# EAGLE board ALU V3.1 (EAGLE 9.6.2), part 1 of 2
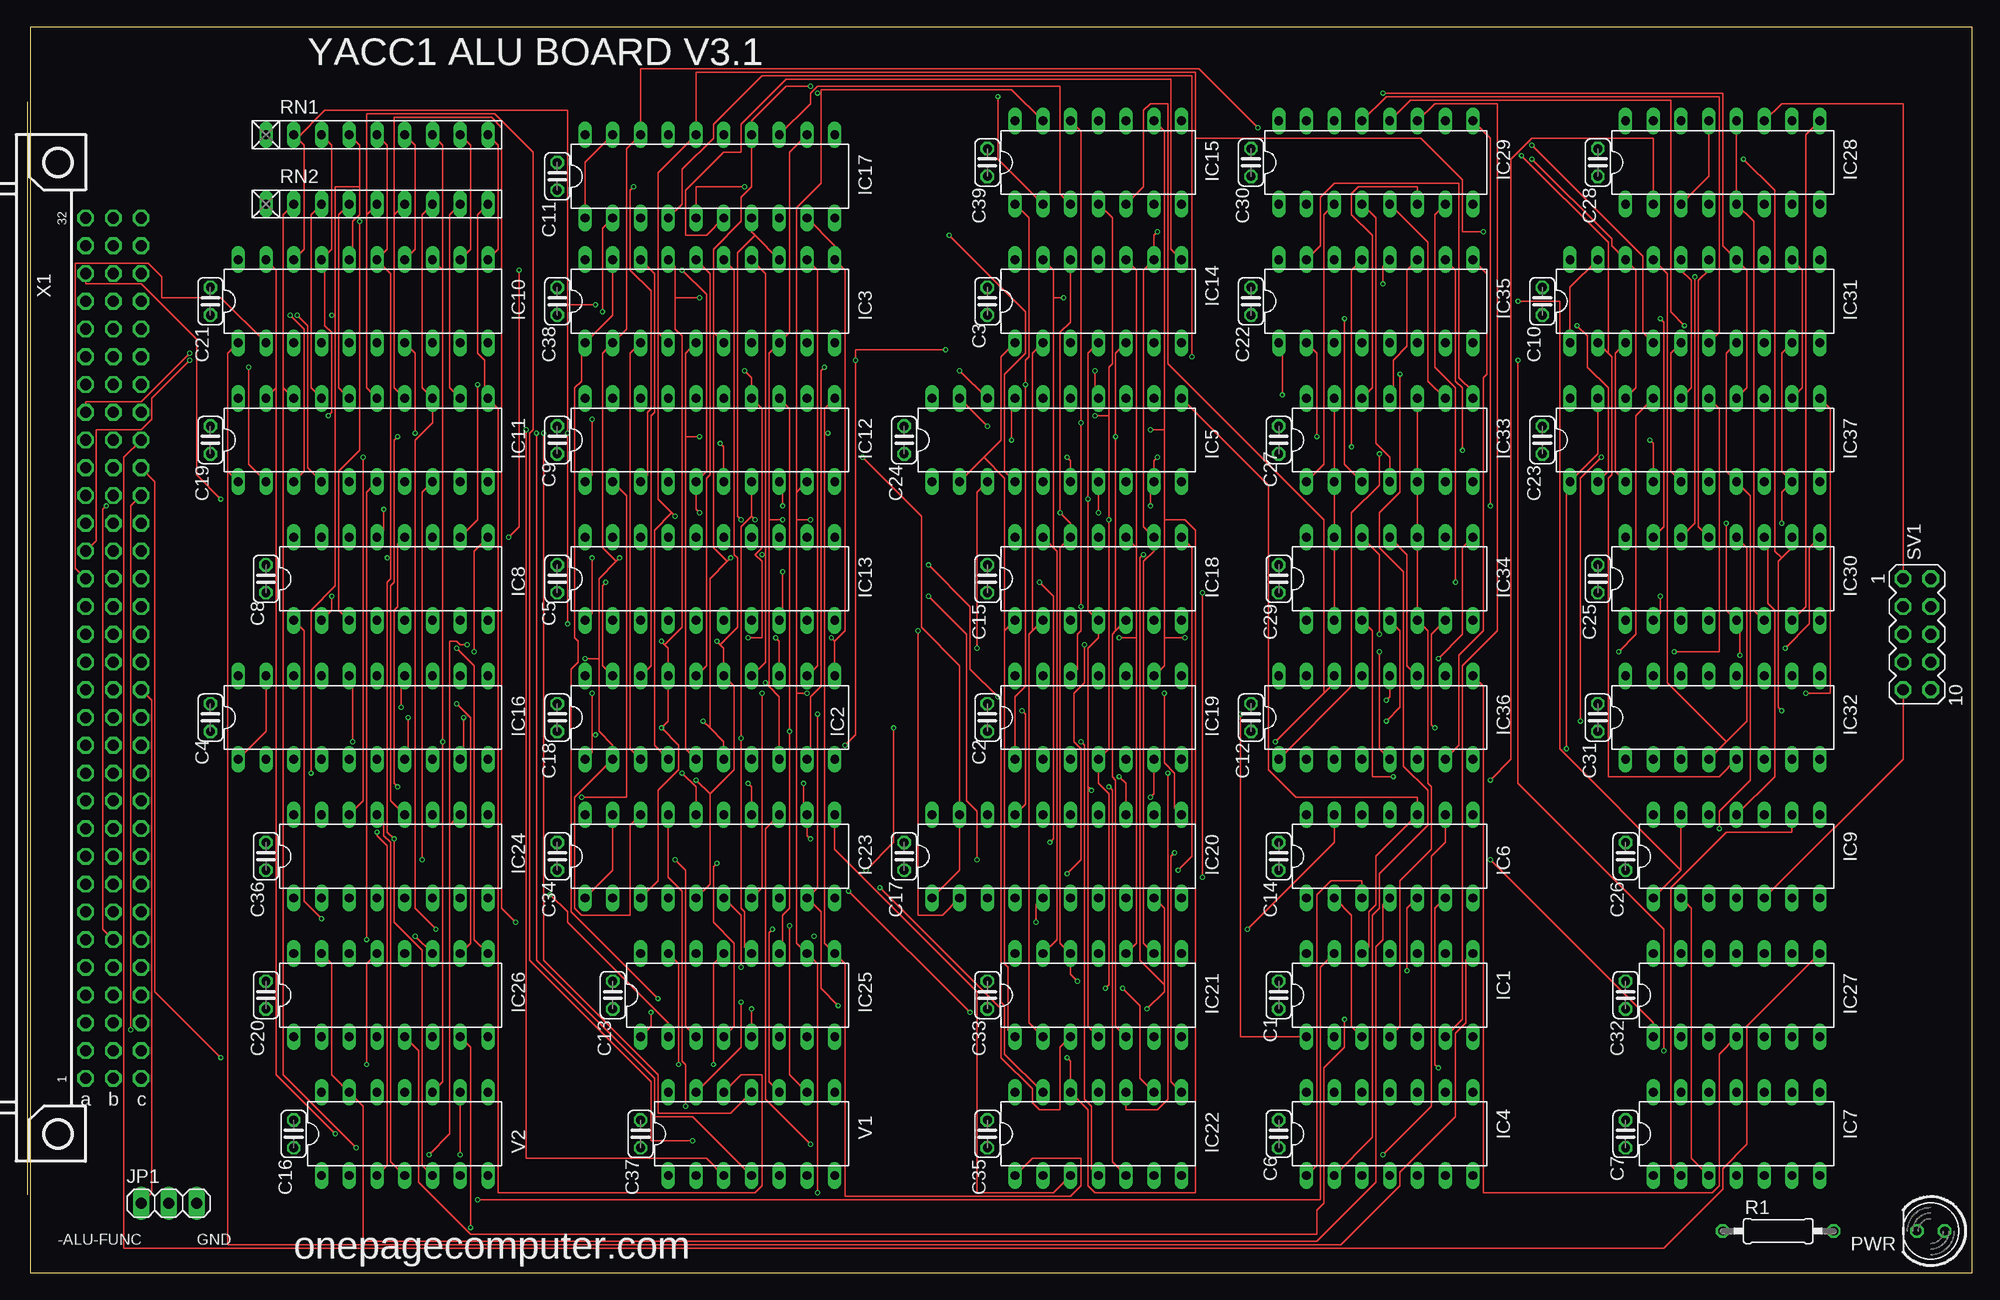
[diagram p0: board, top side]
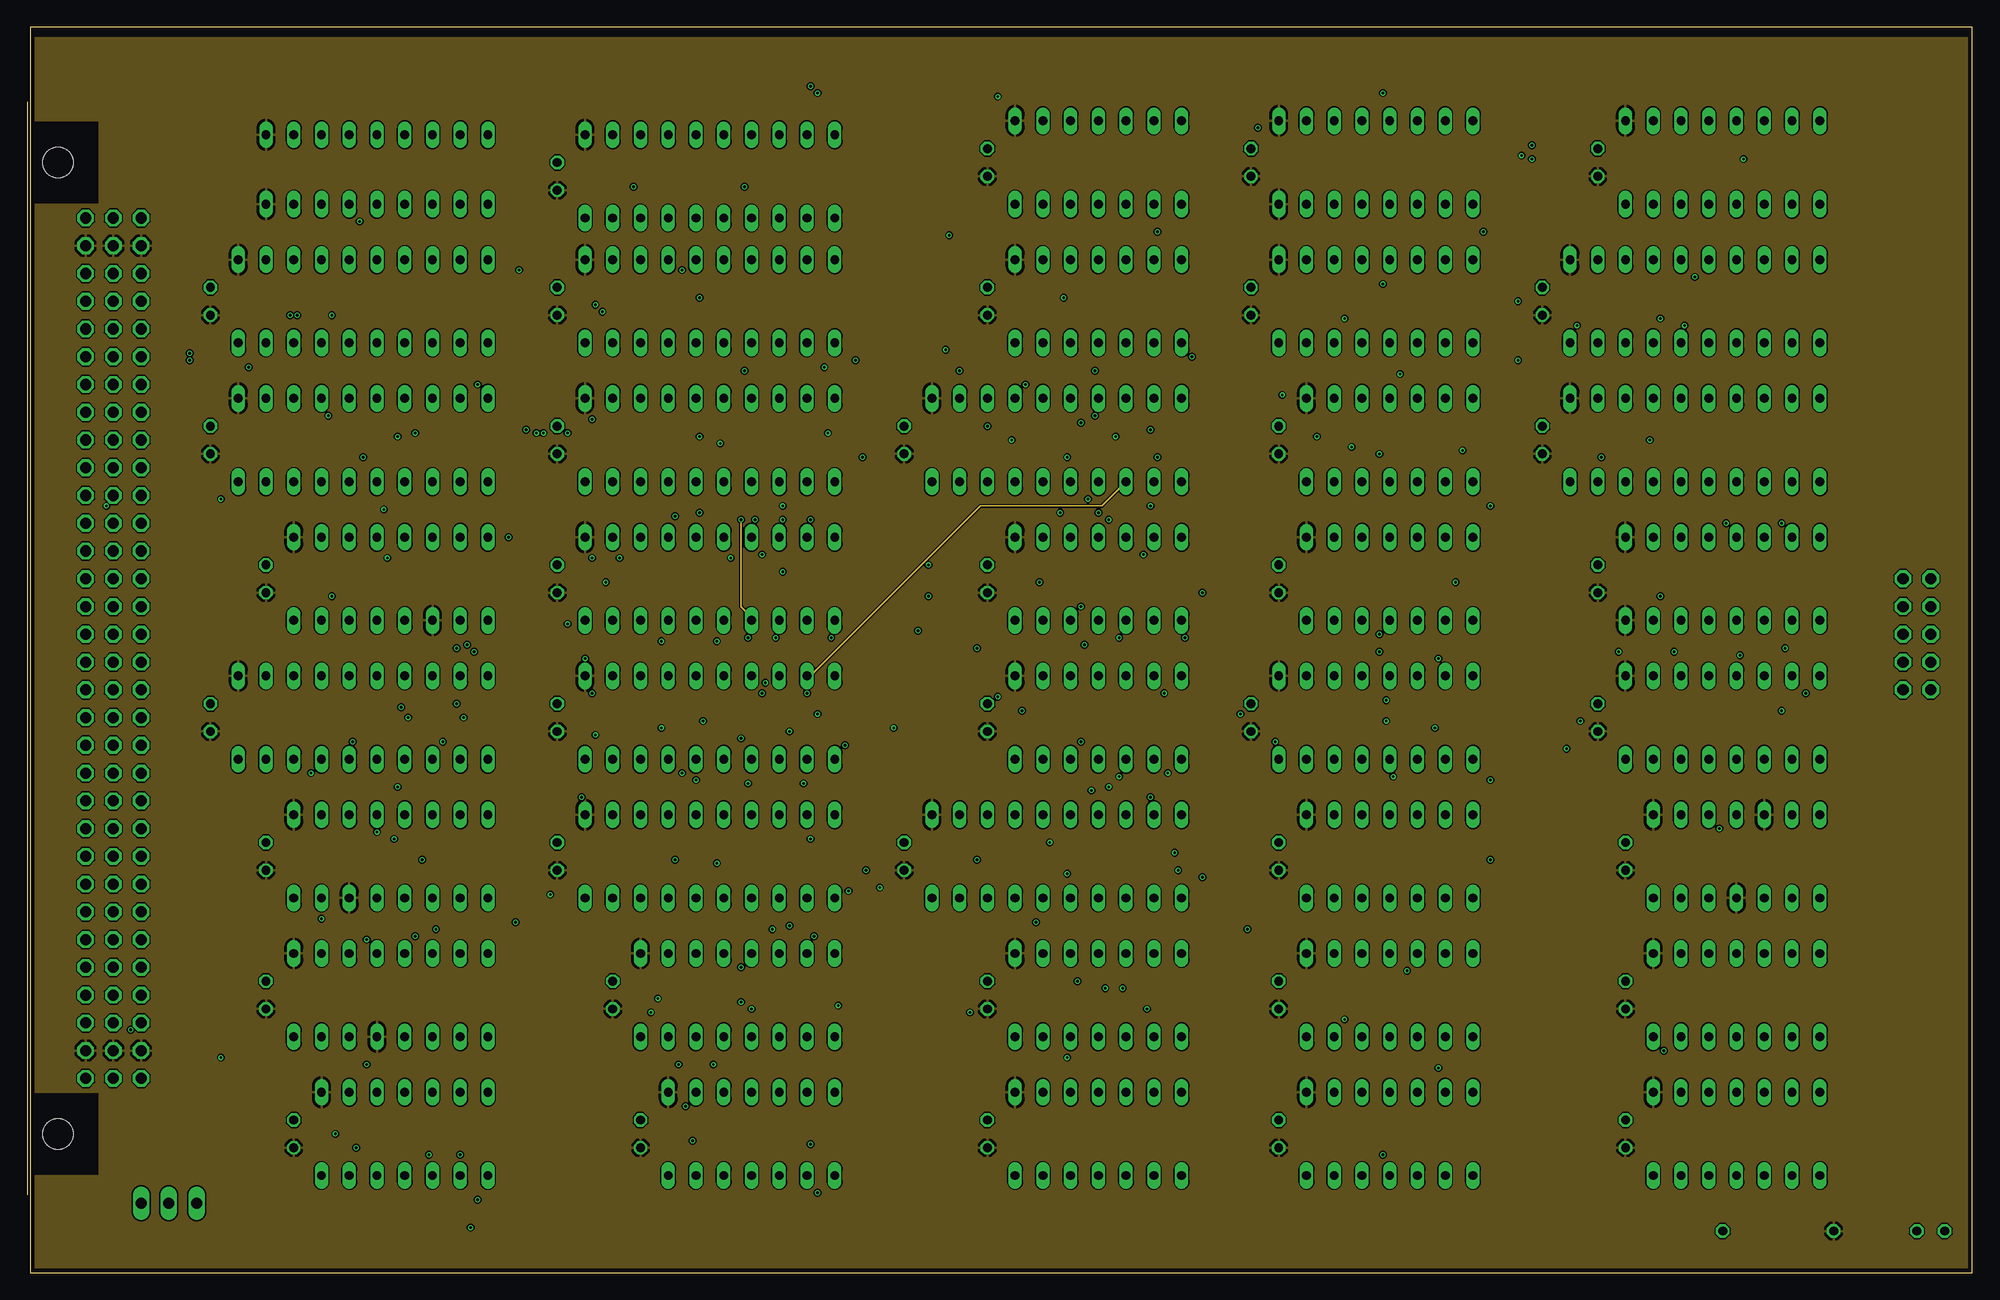
[diagram p1: board, inner layer Route2]
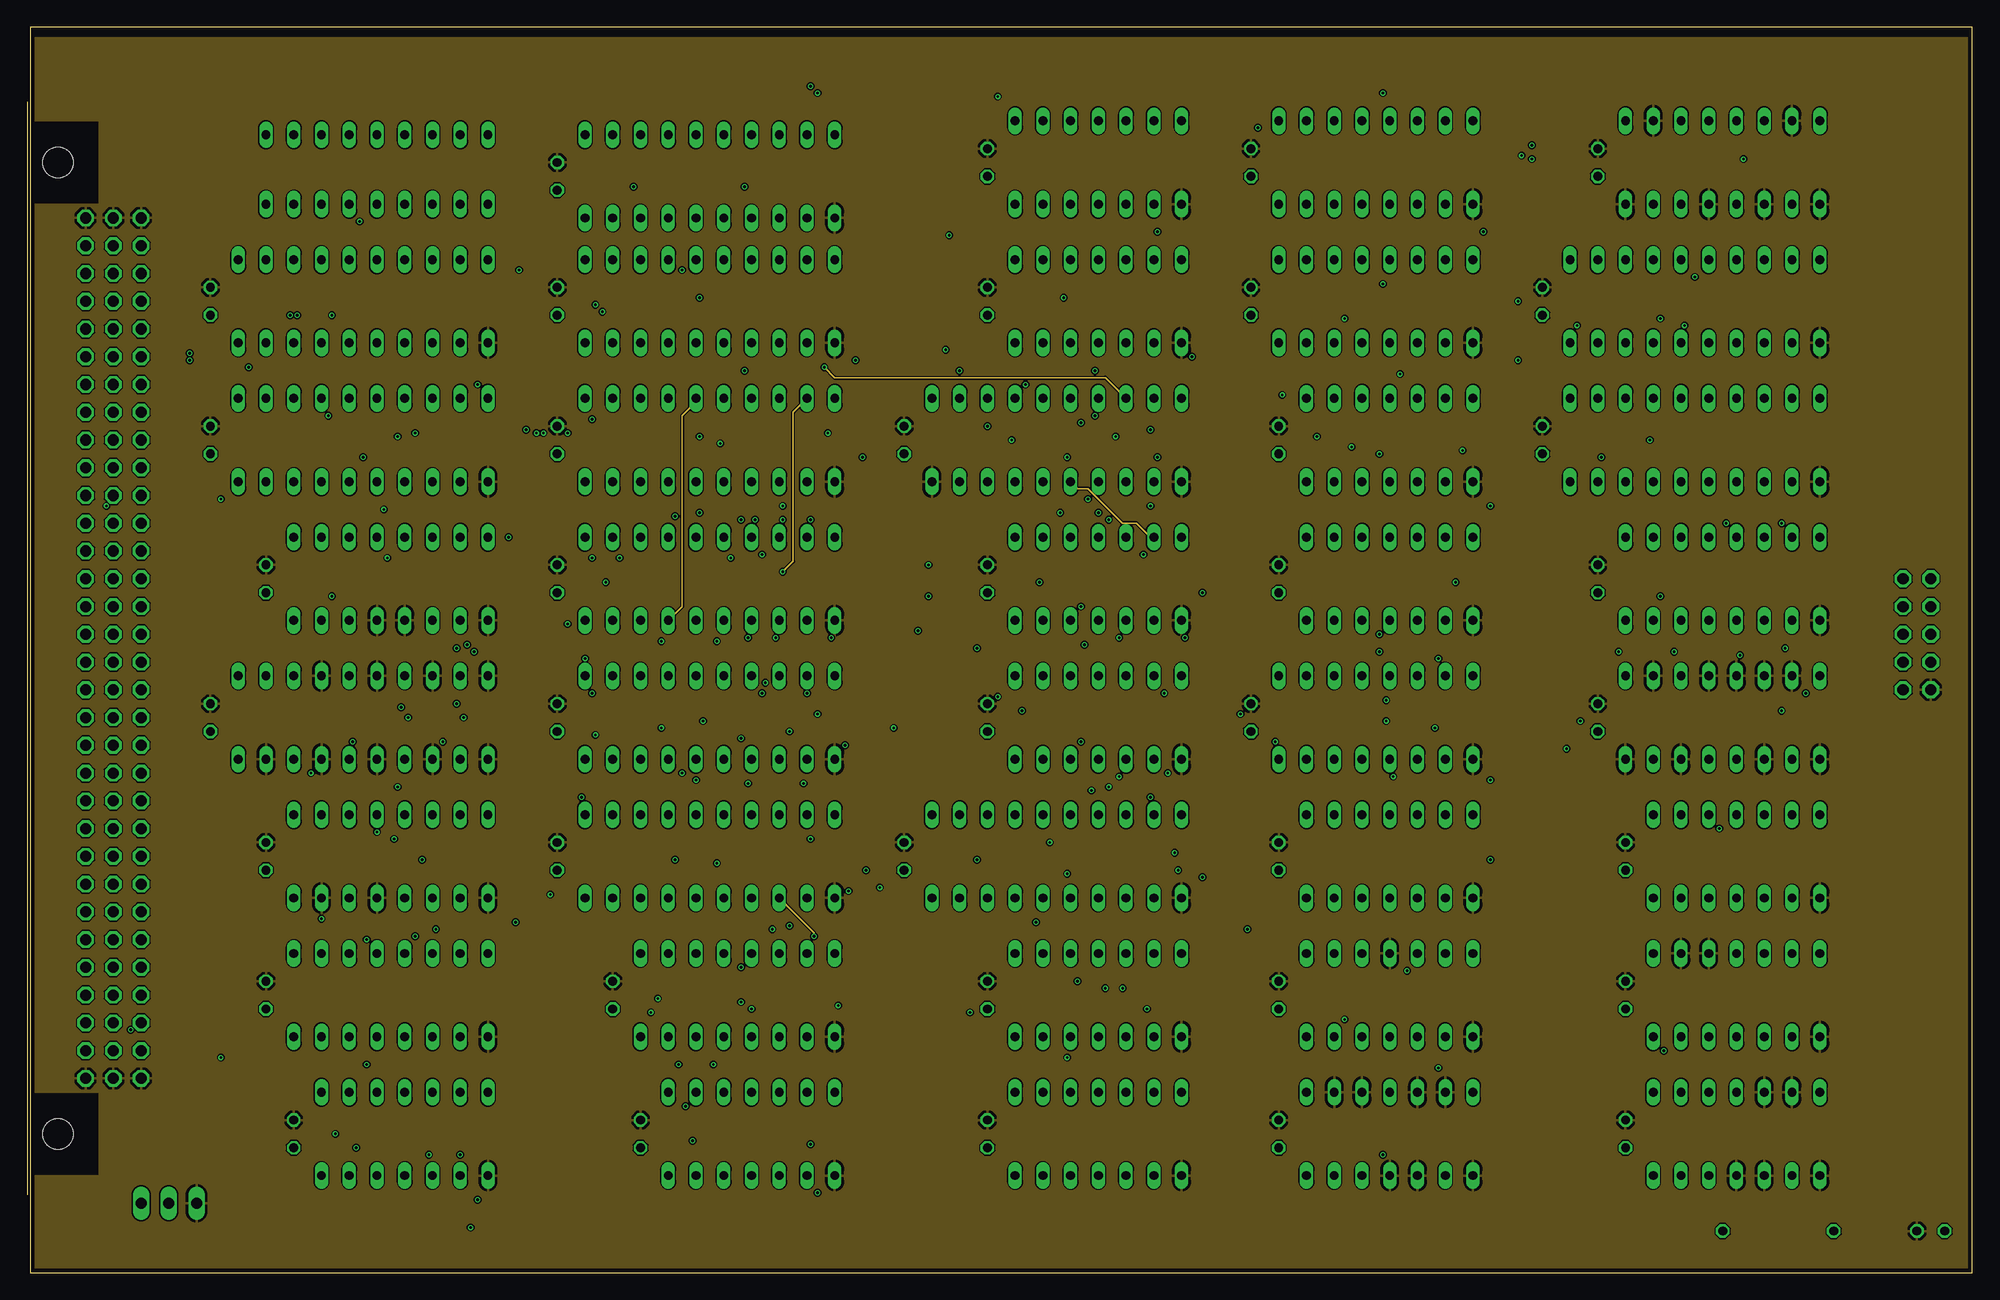
[diagram p2: board, inner layer Route15]
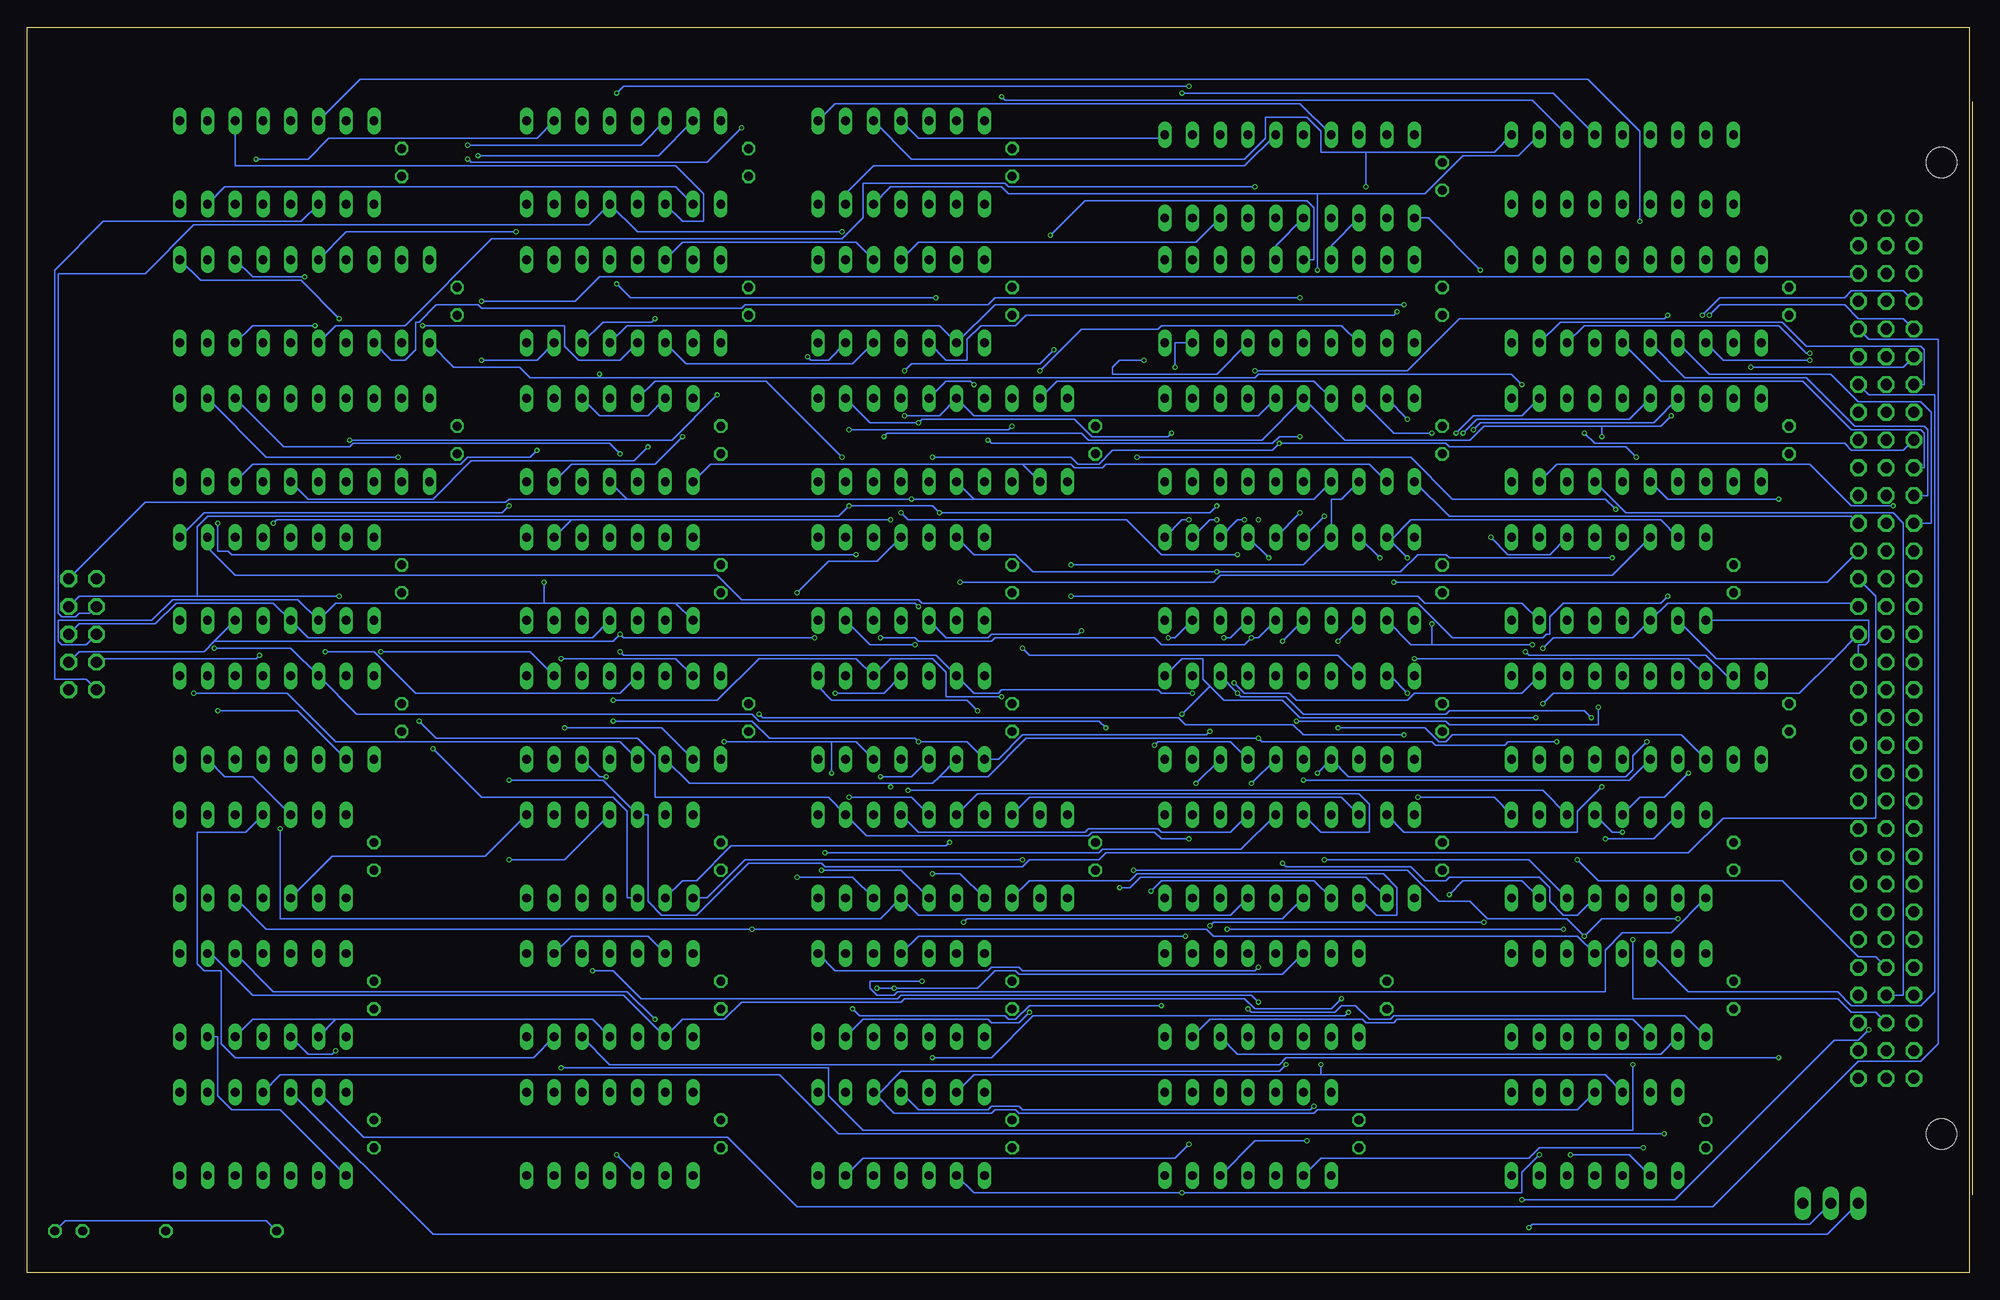
[diagram p3: board, bottom side, seen from below]

Size 177.78 x 113.97 mm. Coordinates in mm from the lower left corner, seen from the top.
Outline: 0,0 177.78,0 177.78,113.97 0,113.97 0,0
Copper layers (1*2*15*16): Top 0.035559375mm / dielectric 0.17018125mm / Route2 0.01778125mm / dielectric 47mil / Route15 0.01778125mm / dielectric 0.17018125mm / Bottom 0.035559375mm
Design rules "oshpark-4layer *": minimum track width 5mil, minimum drill 10mil, track to track 5mil, track to pad 5mil, pad to pad 5mil, via to via 5mil, smd to smd 5mil, copper to edge 15mil, drill to drill 6mil, minimum pad ring 4mil, minimum via ring 4mil, stop-mask expansion 2.5mil, vias tented up to drill 0mil, thermal gap 10mil

## Footprints (pad centres in the part's own frame; a part is rotated, then mirrored left to right if it is on the bottom)
C025-024X044 = drill 0.813 octagon: 1 -1.27,0; 2 1.27,0
DIL14 = drill 0.813 long: 1 -7.62,-3.81; 2 -5.08,-3.81; 3 -2.54,-3.81; 4 0,-3.81; 5 2.54,-3.81; 6 5.08,-3.81; 7 7.62,-3.81; 8 7.62,3.81; 9 5.08,3.81; 10 2.54,3.81; 11 0,3.81; 12 -2.54,3.81; 13 -5.08,3.81; 14 -7.62,3.81
DIL20 = drill 0.813 long: 1 -11.43,-3.81; 2 -8.89,-3.81; 3 -6.35,-3.81; 4 -3.81,-3.81; 5 -1.27,-3.81; 6 1.27,-3.81; 7 3.81,-3.81; 8 6.35,-3.81; 9 8.89,-3.81; 10 11.43,-3.81; 11 11.43,3.81; 12 8.89,3.81; 13 6.35,3.81; 14 3.81,3.81; 15 1.27,3.81; 16 -1.27,3.81; 17 -3.81,3.81; 18 -6.35,3.81; 19 -8.89,3.81; 20 -11.43,3.81
DIL16 = drill 0.813 long: 1 -8.89,-3.81; 2 -6.35,-3.81; 3 -3.81,-3.81; 4 -1.27,-3.81; 5 1.27,-3.81; 6 3.81,-3.81; 7 6.35,-3.81; 8 8.89,-3.81; 9 8.89,3.81; 10 6.35,3.81; 11 3.81,3.81; 12 1.27,3.81; 13 -1.27,3.81; 14 -3.81,3.81; 15 -6.35,3.81; 16 -8.89,3.81
1X03 = drill 1.016 long: 1 -2.54,0; 2 0,0; 3 2.54,0
LED5MM = drill 0.813 octagon: A -1.27,0; K 1.27,0
0207/10 = drill 0.813 octagon: 1 -5.08,0; 2 5.08,0
RN-9 = drill 0.813 long: 1 -10.16,0; 2 -7.62,0; 3 -5.08,0; 4 -2.54,0; 5 0,0; 6 2.54,0; 7 5.08,0; 8 7.62,0; 9 10.16,0
MA05-2 = drill 1.016 octagon: 1 -5.08,-1.27; 2 -5.08,1.27; 3 -2.54,-1.27; 4 -2.54,1.27; 5 0,-1.27; 6 0,1.27; 7 2.54,-1.27; 8 2.54,1.27; 9 5.08,-1.27; 10 5.08,1.27
FABC96R = drill 1.016 octagon: A1 -2.54,39.37; A2 -2.54,36.83; A3 -2.54,34.29; A4 -2.54,31.75; A5 -2.54,29.21; A6 -2.54,26.67; A7 -2.54,24.13; A8 -2.54,21.59; A9 -2.54,19.05; A10 -2.54,16.51; A11 -2.54,13.97; A12 -2.54,11.43; A13 -2.54,8.89; A14 -2.54,6.35; A15 -2.54,3.81; A16 -2.54,1.27; A17 -2.54,-1.27; A18 -2.54,-3.81; A19 -2.54,-6.35; A20 -2.54,-8.89; A21 -2.54,-11.43; A22 -2.54,-13.97; A23 -2.54,-16.51; A24 -2.54,-19.05; A25 -2.54,-21.59; A26 -2.54,-24.13; A27 -2.54,-26.67; A28 -2.54,-29.21; A29 -2.54,-31.75; A30 -2.54,-34.29; A31 -2.54,-36.83; A32 -2.54,-39.37; B1 -5.08,39.37; B2 -5.08,36.83; B3 -5.08,34.29; B4 -5.08,31.75; B5 -5.08,29.21; B6 -5.08,26.67; B7 -5.08,24.13; B8 -5.08,21.59; B9 -5.08,19.05; B10 -5.08,16.51; B11 -5.08,13.97; B12 -5.08,11.43; B13 -5.08,8.89; B14 -5.08,6.35; B15 -5.08,3.81; B16 -5.08,1.27; B17 -5.08,-1.27; B18 -5.08,-3.81; B19 -5.08,-6.35; B20 -5.08,-8.89; B21 -5.08,-11.43; B22 -5.08,-13.97; B23 -5.08,-16.51; B24 -5.08,-19.05; B25 -5.08,-21.59; B26 -5.08,-24.13; B27 -5.08,-26.67; B28 -5.08,-29.21; B29 -5.08,-31.75; B30 -5.08,-34.29; B31 -5.08,-36.83; B32 -5.08,-39.37; C1 -7.62,39.37; C2 -7.62,36.83; C3 -7.62,34.29; C4 -7.62,31.75; C5 -7.62,29.21; C6 -7.62,26.67; C7 -7.62,24.13; C8 -7.62,21.59; C9 -7.62,19.05; C10 -7.62,16.51; C11 -7.62,13.97; C12 -7.62,11.43; C13 -7.62,8.89; C14 -7.62,6.35; C15 -7.62,3.81; C16 -7.62,1.27; C17 -7.62,-1.27; C18 -7.62,-3.81; C19 -7.62,-6.35; C20 -7.62,-8.89; C21 -7.62,-11.43; C22 -7.62,-13.97; C23 -7.62,-16.51; C24 -7.62,-19.05; C25 -7.62,-21.59; C26 -7.62,-24.13; C27 -7.62,-26.67; C28 -7.62,-29.21; C29 -7.62,-31.75; C30 -7.62,-34.29; C31 -7.62,-36.83; C32 -7.62,-39.37 | hole 2.794: 0,-44.456; 0,44.456

## Placement (x,y rotation side)
C1  .1uf  [C025-024X044]  114.3,25.4 90 top
C2  .1uf  [C025-024X044]  87.63,50.8 90 top
C3  .1uf  [C025-024X044]  87.63,88.9 90 top
C4  .1uf  [C025-024X044]  16.51,50.8 90 top
C5  .1uf  [C025-024X044]  48.26,63.5 90 top
C6  .1uf  [C025-024X044]  114.3,12.7 90 top
C7  .1uf  [C025-024X044]  146.05,12.7 90 top
C8  .1uf  [C025-024X044]  21.59,63.5 90 top
C9  .1uf  [C025-024X044]  48.26,76.2 90 top
C10  .1uf  [C025-024X044]  138.43,88.9 90 top
C11  .1uf  [C025-024X044]  48.26,100.33 90 top
C12  .1uf  [C025-024X044]  111.76,50.8 90 top
C13  .1uf  [C025-024X044]  53.34,25.4 90 top
C14  .1uf  [C025-024X044]  114.3,38.1 90 top
C15  .1uf  [C025-024X044]  87.63,63.5 90 top
C16  .1uf  [C025-024X044]  24.13,12.7 90 top
C17  .1uf  [C025-024X044]  80.01,38.1 90 top
C18  .1uf  [C025-024X044]  48.26,50.8 90 top
C19  .1uf  [C025-024X044]  16.51,76.2 90 top
C20  .1uf  [C025-024X044]  21.59,25.4 90 top
C21  ,1uf  [C025-024X044]  16.51,88.9 90 top
C22  .1uf  [C025-024X044]  111.76,88.9 90 top
C23  .1uf  [C025-024X044]  138.43,76.2 90 top
C24  .1uf  [C025-024X044]  80.01,76.2 90 top
C25  .1uf  [C025-024X044]  143.51,63.5 90 top
C26  .1uf  [C025-024X044]  146.05,38.1 90 top
C27  .1uf  [C025-024X044]  114.3,76.2 90 top
C28  .1uf  [C025-024X044]  143.51,101.6 90 top
C29  .1uf  [C025-024X044]  114.3,63.5 90 top
C30  .1uf  [C025-024X044]  111.76,101.6 90 top
C31  .1uf  [C025-024X044]  143.51,50.8 90 top
C32  .1uf  [C025-024X044]  146.05,25.4 90 top
C33  .1uf  [C025-024X044]  87.63,25.4 90 top
C34  .1uf  [C025-024X044]  48.26,38.1 90 top
C35  .1uf  [C025-024X044]  87.63,12.7 90 top
C36  .1uf  [C025-024X044]  21.59,38.1 90 top
C37  .1uf  [C025-024X044]  55.88,12.7 90 top
C38  .1uf  [C025-024X044]  48.26,88.9 90 top
C39  .1uf  [C025-024X044]  87.63,101.6 90 top
IC1  74ALS04N  [DIL14]  124.46,25.4 0 top
IC2  74LS240N  [DIL20]  62.23,50.8 0 top
IC3  74LS244N  [DIL20]  62.23,88.9 0 top
IC4  74LS00N  [DIL14]  124.46,12.7 0 top
IC5  74LS374N  [DIL20]  93.98,76.2 0 top
IC6  74ALS08N  [DIL14]  124.46,38.1 0 top
IC7  74LS32N  [DIL14]  156.21,12.7 0 top
IC8  74LS138N  [DIL16]  33.02,63.5 0 top
IC9  74LS74N  [DIL14]  156.21,38.1 0 top
IC10  74LS245N  [DIL20]  30.48,88.9 0 top
IC11  74LS245N  [DIL20]  30.48,76.2 0 top
IC12  74LS244N  [DIL20]  62.23,76.2 0 top
IC13  74LS244N  [DIL20]  62.23,63.5 0 top
IC14  74LS86N  [DIL14]  97.79,88.9 0 top
IC15  74LS86N  [DIL14]  97.79,101.6 0 top
IC16  74LS244N  [DIL20]  30.48,50.8 0 top
IC17  74LS244N  [DIL20]  62.23,100.33 0 top
IC18  74LS08N  [DIL14]  97.79,63.5 0 top
IC19  74LS08N  [DIL14]  97.79,50.8 0 top
IC20  74LS244N  [DIL20]  93.98,38.1 0 top
IC21  74LS32N  [DIL14]  97.79,25.4 0 top
IC22  74LS32N  [DIL14]  97.79,12.7 0 top
IC23  74LS244N  [DIL20]  62.23,38.1 0 top
IC24  74LS85N  [DIL16]  33.02,38.1 0 top
IC25  74LS85N  [DIL16]  64.77,25.4 0 top
IC26  74LS251N  [DIL16]  33.02,25.4 0 top
IC27  74LS86N  [DIL14]  156.21,25.4 0 top
IC28  74LS153N  [DIL16]  154.94,101.6 0 top
IC29  74LS194N  [DIL16]  123.19,101.6 0 top
IC30  74LS194N  [DIL16]  154.94,63.5 0 top
IC31  74LS244N  [DIL20]  152.4,88.9 0 top
IC32  74LS153N  [DIL16]  154.94,50.8 0 top
IC33  74LS86N  [DIL14]  124.46,76.2 0 top
IC34  74LS86N  [DIL14]  124.46,63.5 0 top
IC35  74LS283N  [DIL16]  123.19,88.9 0 top
IC36  74LS283N  [DIL16]  123.19,50.8 0 top
IC37  74LS244N  [DIL20]  152.4,76.2 0 top
JP1  [1X03]  12.7,6.35 0 top
PWR  [LED5MM]  173.99,3.81 180 top
R1  330  [0207/10]  160.02,3.81 0 top
RN1  10k  [RN-9]  31.75,104.14 0 top
RN2  10k  [RN-9]  31.75,97.79 0 top
SV1  [MA05-2]  172.72,58.42 270 top
V1  744078N  [DIL14]  66.04,12.7 0 top
V2  744078N  [DIL14]  34.29,12.7 0 top
X1  FABC96R  [FABC96R]  2.54,57.15 180 top

## Library data of the parts
C1-C39 = rcl
IC1-IC37 = 74xx-us
JP1 = pinhead
PWR = led
R1 = eagle-ltspice; SPICEMODEL: NONE; SPICEPREFIX: R
RN1 RN2 = resistor-net; OC_FARNELL: unknown; OC_NEWARK: unknown
SV1 = con-lstb; OC_FARNELL: unknown; OC_NEWARK: unknown
V1 V2 = 74ttl-din
X1 = con-vg

## Nets
-AC-LD: IC1.9 IC1.13 X1.C22
-AC-LD-INV: IC1.1 IC2.1 IC2.19 X1.C20
-AC-RD: IC12.1 IC12.19 X1.C21
-ADD: IC6.1 IC8.7
-ADD/SUB: IC4.1 IC6.3 IC37.1 IC37.19
-ADDR-REG-LD0: X1.C4
-ADDR-REG-LD1: X1.C6
-ADDR-REG-RD0: X1.C3
-ADDR-REG-RD1: X1.C5
-ALU-FUNC: IC7.12 JP1.1 X1.C15
-ALU-IO-EN: IC7.11 IC10.19 IC11.19
-AND: IC8.13 IC20.1 IC20.19
-BUS-EN: IC7.13 X1.C28
-BUS-OUT: IC1.8 IC10.1 IC11.1
-DATA: IC8.15 IC13.1 IC13.19
-HL-SWAP: X1.C25
-INT: X1.C13
-INTA: X1.C14
-IO-ADDR-LD: X1.C11
-IO-RD: X1.B25
-IO-WR: X1.B26
-MEM-RD: X1.B23
-MEM-WR: X1.B24
-OR: IC8.12 IC23.1 IC23.19
-REG-DN: X1.B21
-REG-FUNC-LD: X1.B8
-REG-FUNC-RD: X1.B7
-REG-LD-HI: X1.B20
-REG-LD-LO: X1.B18
-REG-RD-HI: X1.B19
-REG-RD-LO: X1.B17
-REG-UP: X1.B22
-RESET: IC9.1 IC9.13 X1.C30
-RUN: X1.C29
-SHIFT: IC4.2 IC8.10 IC31.1 IC31.19
-SR-LD: IC1.5 X1.C23
-SUB: IC1.3 IC6.2 IC8.14
-TMP-REG-LD0: X1.B28
-TMP-REG-LD1: X1.B30
-TMP-REG-RD0: X1.B27
-TMP-REG-RD1: X1.B29
-VMA: X1.C12
-XOR: IC8.11 IC17.1 IC17.19
-ZERO: IC8.9 IC16.1 IC16.19
AC-LD: IC1.12 IC5.11 IC6.10
AC-LD-INV: IC1.2 IC3.1 IC3.19 IC27.9
ACI-DATA0: IC2.18 IC3.18 IC5.3
ACI-DATA1: IC2.16 IC3.16 IC5.4
ACI-DATA2: IC2.14 IC3.14 IC5.7
ACI-DATA3: IC2.12 IC3.12 IC5.8
ACI-DATA4: IC2.9 IC3.9 IC5.13
ACI-DATA5: IC2.7 IC3.7 IC5.14
ACI-DATA6: IC2.5 IC3.5 IC5.17
ACI-DATA7: IC2.3 IC3.3 IC5.18
ACO-DATA0: IC5.2 IC12.2 IC14.1 IC18.1 IC21.1 IC24.9 IC28.11 IC29.3 IC33.1 SV1.1
ACO-DATA1: IC5.5 IC12.4 IC14.4 IC18.4 IC21.4 IC24.11 IC29.4 IC33.4 SV1.2
ACO-DATA2: IC5.6 IC12.6 IC14.9 IC18.9 IC21.9 IC24.14 IC29.5 IC33.9 SV1.3
ACO-DATA3: IC5.9 IC12.8 IC14.12 IC18.12 IC21.12 IC24.1 IC29.6 IC30.2 IC33.12 SV1.4
ACO-DATA4: IC5.12 IC12.11 IC15.12 IC19.12 IC22.1 IC25.9 IC29.7 IC30.3 IC34.1 SV1.5
ACO-DATA5: IC5.15 IC12.13 IC15.1 IC19.1 IC22.4 IC25.11 IC30.4 IC34.4 SV1.6
ACO-DATA6: IC5.16 IC12.15 IC15.4 IC19.4 IC22.9 IC25.14 IC30.5 IC34.9 SV1.7
ACO-DATA7: IC5.19 IC12.17 IC15.9 IC19.9 IC22.12 IC25.1 IC28.5 IC28.12 IC30.6 IC34.12 SV1.8
ADDR0: X1.A3
ADDR1: X1.A4
ADDR2: X1.A5
ADDR3: X1.A6
ADDR4: X1.A7
ADDR5: X1.A8
ADDR6: X1.A9
ADDR7: X1.A10
ADDR8: X1.A11
ADDR9: X1.A12
ADDR10: X1.A13
ADDR11: X1.A14
ADDR12: X1.A15
ADDR13: X1.A16
ADDR14: X1.A17
ADDR15: X1.A18
ALU0: IC8.1 IC26.11 IC29.9 IC30.9 IC32.14 X1.C16
ALU1: IC8.2 IC26.10 IC29.10 IC30.10 IC32.2 X1.C17
ALU2: IC8.3 IC26.9 IC28.14 X1.C18
ALU3: IC6.12 IC28.2 X1.C19
BDATA0: IC10.18 IC12.18 IC13.2 IC14.2 IC18.2 IC21.2 IC24.10 IC35.5 RN1.2 V2.2
BDATA1: IC10.17 IC12.16 IC13.4 IC14.5 IC18.5 IC21.5 IC24.12 IC35.3 RN1.3 V2.3
BDATA2: IC10.16 IC12.14 IC13.6 IC14.10 IC18.10 IC21.10 IC24.13 IC35.14 RN1.4 V2.4
BDATA3: IC10.15 IC12.12 IC13.8 IC14.13 IC18.13 IC21.13 IC24.15 IC35.12 RN1.5 V2.5
BDATA4: IC10.14 IC12.9 IC13.11 IC15.13 IC19.13 IC22.2 IC25.10 IC36.5 RN1.6 V2.9
BDATA5: IC10.13 IC12.7 IC13.13 IC15.2 IC19.2 IC22.5 IC25.12 IC36.3 RN1.7 V2.10
BDATA6: IC10.12 IC12.5 IC13.15 IC15.5 IC19.5 IC22.10 IC25.13 IC36.14 RN1.8 V2.11
BDATA7: IC10.11 IC12.3 IC13.17 IC15.10 IC19.10 IC22.13 IC25.15 IC36.12 RN1.9 V2.12
BDATA8: IC11.18 RN2.2 V1.2
BDATA9: IC11.17 RN2.3 V1.3
BDATA10: IC11.16 RN2.4 V1.4
BDATA11: IC11.15 RN2.5 V1.5
BDATA12: IC11.14 RN2.6 V1.9
BDATA13: IC11.13 RN2.7 V1.10
BDATA14: IC11.12 RN2.8 V1.11
BDATA15: IC11.11 RN2.9 V1.12
BR-COND: IC27.8 X1.C24
C/SHIFT: IC6.13 IC9.5 IC26.12 IC28.3 IC28.13 SV1.9
CO/BO: IC7.1 IC27.6
DATA0: IC10.2 X1.A19
DATA1: IC10.3 X1.A20
DATA2: IC10.4 X1.A21
DATA3: IC10.5 X1.A22
DATA4: IC10.6 X1.A23
DATA5: IC10.7 X1.A24
DATA6: IC10.8 X1.A25
DATA7: IC10.9 X1.A26
DATA8: IC11.2 X1.A27
DATA9: IC11.3 X1.A28
DATA10: IC11.4 X1.A29
DATA11: IC11.5 X1.A30
DATA12: IC11.6 X1.B3
DATA13: IC11.7 X1.B4
DATA14: IC11.8 X1.B5
DATA15: IC11.9 X1.B6
GND: C1.2 C2.2 C3.2 C4.2 C5.2 C6.2 C7.2 C8.2 C9.2 C10.2 C11.2 C12.2 C13.2 C14.2 C15.2 C16.2 C17.2 C18.2 C19.2 C20.2 C21.2 C22.2 C23.2 C24.2 C25.2 C26.2 C27.2 C28.2 C29.2 C30.2 C31.2 C32.2 C33.2 C34.2 C35.2 C36.2 C37.2 C38.2 C39.2 IC1.7 IC1.11 IC2.10 IC3.10 IC4.4 IC4.5 IC4.7 IC4.9 IC4.10 IC4.12 IC4.13 IC5.1 IC5.10 IC6.7 IC7.4 IC7.5 IC7.7 IC7.9 IC7.10 IC8.4 IC8.5 IC8.8 IC9.7 IC10.10 IC11.10 IC12.10 IC13.10 IC14.7 IC15.7 IC16.2 IC16.4 IC16.6 IC16.8 IC16.10 IC16.11 IC16.13 IC16.15 IC16.17 IC17.10 IC18.7 IC19.7 IC20.10 IC21.7 IC22.7 IC23.10 IC24.2 IC24.4 IC24.8 IC25.8 IC26.8 IC27.7 IC27.12 IC27.13 IC28.1 IC28.4 IC28.6 IC28.8 IC28.10 IC28.15 IC29.8 IC30.8 IC31.10 IC32.1 IC32.3 IC32.6 IC32.8 IC32.10 IC32.11 IC32.12 IC32.13 IC32.15 IC33.7 IC34.7 IC35.8 IC36.8 IC37.10 JP1.3 PWR.K SV1.10 V1.7 V2.7 X1.A1 X1.A32 X1.B1 X1.B32 X1.C1 X1.C32
IN: IC26.14 X1.C26
INV-IN0: IC2.2 IC3.2 IC13.18 IC16.18 IC17.18 IC20.18 IC23.18 IC31.18 IC37.18
INV-IN1: IC2.4 IC3.4 IC13.16 IC16.16 IC17.16 IC20.16 IC23.16 IC31.16 IC37.16
INV-IN2: IC2.6 IC3.6 IC13.14 IC16.14 IC17.14 IC20.14 IC23.14 IC31.14 IC37.14
INV-IN3: IC2.8 IC3.8 IC13.12 IC16.12 IC17.12 IC20.12 IC23.12 IC31.12 IC37.12
INV-IN4: IC2.11 IC3.11 IC13.9 IC16.9 IC17.9 IC20.9 IC23.9 IC31.9 IC37.9
INV-IN5: IC2.13 IC3.13 IC13.7 IC16.7 IC17.7 IC20.7 IC23.7 IC31.7 IC37.7
INV-IN6: IC2.15 IC3.15 IC13.5 IC16.5 IC17.5 IC20.5 IC23.5 IC31.5 IC37.5
INV-IN7: IC2.17 IC3.17 IC13.3 IC16.3 IC17.3 IC20.3 IC23.3 IC31.3 IC37.3
IO-ADDR0: X1.C7
IO-ADDR1: X1.C8
IO-ADDR2: X1.C9
IO-ADDR3: X1.C10
N$1: IC27.4 IC36.9
N$2: IC27.3 IC35.7
N$3: IC4.3 IC6.9
N$4: IC26.7 JP1.2
N$5: IC6.8 IC9.3
N$6: IC6.4 IC26.15 V2.13
N$7: IC7.3 IC9.2
N$8: IC6.11 IC27.1
N$11: IC9.12 IC32.7
N$12: IC33.6 IC35.2
N$13: IC34.6 IC36.2
N$14: PWR.A R1.1
N$26: IC33.8 IC35.15
N$27: IC33.11 IC35.11
N$28: IC33.3 IC35.6
N$29: IC34.3 IC36.6
N$31: IC34.8 IC36.15
N$32: IC34.11 IC36.11
N$33: IC35.4 IC37.2
N$34: IC35.1 IC37.4
N$35: IC35.13 IC37.6
N$36: IC35.10 IC37.8
N$37: IC36.4 IC37.11
N$38: IC36.1 IC37.13
N$39: IC36.13 IC37.15
N$40: IC36.10 IC37.17
N$41: IC35.9 IC36.7
N$43: IC24.5 IC25.4
N$45: IC24.6 IC25.3
N$46: IC24.7 IC25.2
N$47: IC25.7 IC26.3
N$48: IC25.6 IC26.2
N$49: IC25.5 IC26.1
N$52: IC6.5 V1.13
N$55: IC6.6 IC26.13
N$56: IC26.5 IC27.10
N$57: IC29.15 IC31.2 IC32.5
N$66: IC29.14 IC31.4
N$69: IC29.13 IC31.6
N$70: IC29.12 IC31.8
N$71: IC30.15 IC31.11
N$72: IC30.14 IC31.13
N$73: IC30.13 IC31.15
N$74: IC30.12 IC31.17 IC32.4
N$75: IC28.7 IC29.2
N$76: IC28.9 IC30.7
N$77: IC21.3 IC23.2
N$78: IC21.6 IC23.4
N$79: IC21.8 IC23.6
N$81: IC21.11 IC23.8
N$82: IC22.3 IC23.11
N$83: IC22.6 IC23.13
N$84: IC22.8 IC23.15
N$85: IC22.11 IC23.17
N$86: IC18.3 IC20.2
N$87: IC18.6 IC20.4
N$88: IC18.8 IC20.6
N$89: IC18.11 IC20.8
N$90: IC19.11 IC20.11
N$91: IC19.3 IC20.13
N$92: IC19.6 IC20.15
N$93: IC19.8 IC20.17
N$94: IC14.3 IC17.2
N$95: IC14.6 IC17.4
N$96: IC14.8 IC17.6
N$97: IC14.11 IC17.8
N$98: IC15.11 IC17.11
N$99: IC15.3 IC17.13
N$100: IC15.6 IC17.15
N$101: IC15.8 IC17.17
OUT: X1.C27
REG-LD-ID0: X1.B13
REG-LD-ID1: X1.B14
REG-LD-ID2: X1.B15
REG-LD-ID3: X1.B16
REG-RD-ID0: X1.B9
REG-RD-ID1: X1.B10
REG-RD-ID2: X1.B11
REG-RD-ID3: X1.B12
SHIFT-OUT: IC7.2 IC9.9
SR-LD: IC1.6 IC9.11 IC29.11 IC30.11
SUB: IC1.4 IC27.2 IC27.5 IC33.2 IC33.5 IC33.10 IC33.13 IC34.2 IC34.5 IC34.10 IC34.13
VCC: C1.1 C2.1 C3.1 C4.1 C5.1 C6.1 C7.1 C8.1 C9.1 C10.1 C11.1 C12.1 C13.1 C14.1 C15.1 C16.1 C17.1 C18.1 C19.1 C20.1 C21.1 C22.1 C23.1 C24.1 C25.1 C26.1 C27.1 C28.1 C29.1 C30.1 C31.1 C32.1 C33.1 C34.1 C35.1 C36.1 C37.1 C38.1 C39.1 IC1.14 IC2.20 IC3.20 IC4.14 IC5.20 IC6.14 IC7.14 IC8.6 IC8.16 IC9.4 IC9.10 IC9.14 IC10.20 IC11.20 IC12.20 IC13.20 IC14.14 IC15.14 IC16.20 IC17.20 IC18.14 IC19.14 IC20.20 IC21.14 IC22.14 IC23.20 IC24.3 IC24.16 IC25.16 IC26.4 IC26.16 IC27.14 IC28.16 IC29.1 IC29.16 IC30.1 IC30.16 IC31.20 IC32.16 IC33.14 IC34.14 IC35.16 IC36.16 IC37.20 R1.2 RN1.1 RN2.1 V1.14 V2.14 X1.A2 X1.A31 X1.B2 X1.B31 X1.C2 X1.C31